# Altium PCB PCB11.PcbDoc (part 2 of 2)
Units mm, origin at the board's own origin, x right, y up, seen from the top; angles counter-clockwise.
Board outline 71.75 x 53.09 mm, 4 copper layers (Top Layer 1, Top Layer, Bottom Layer, Bottom Layer 1), stack 0.603 mm thick; 100 components, 62 nets, 352 pads, 213 vias.
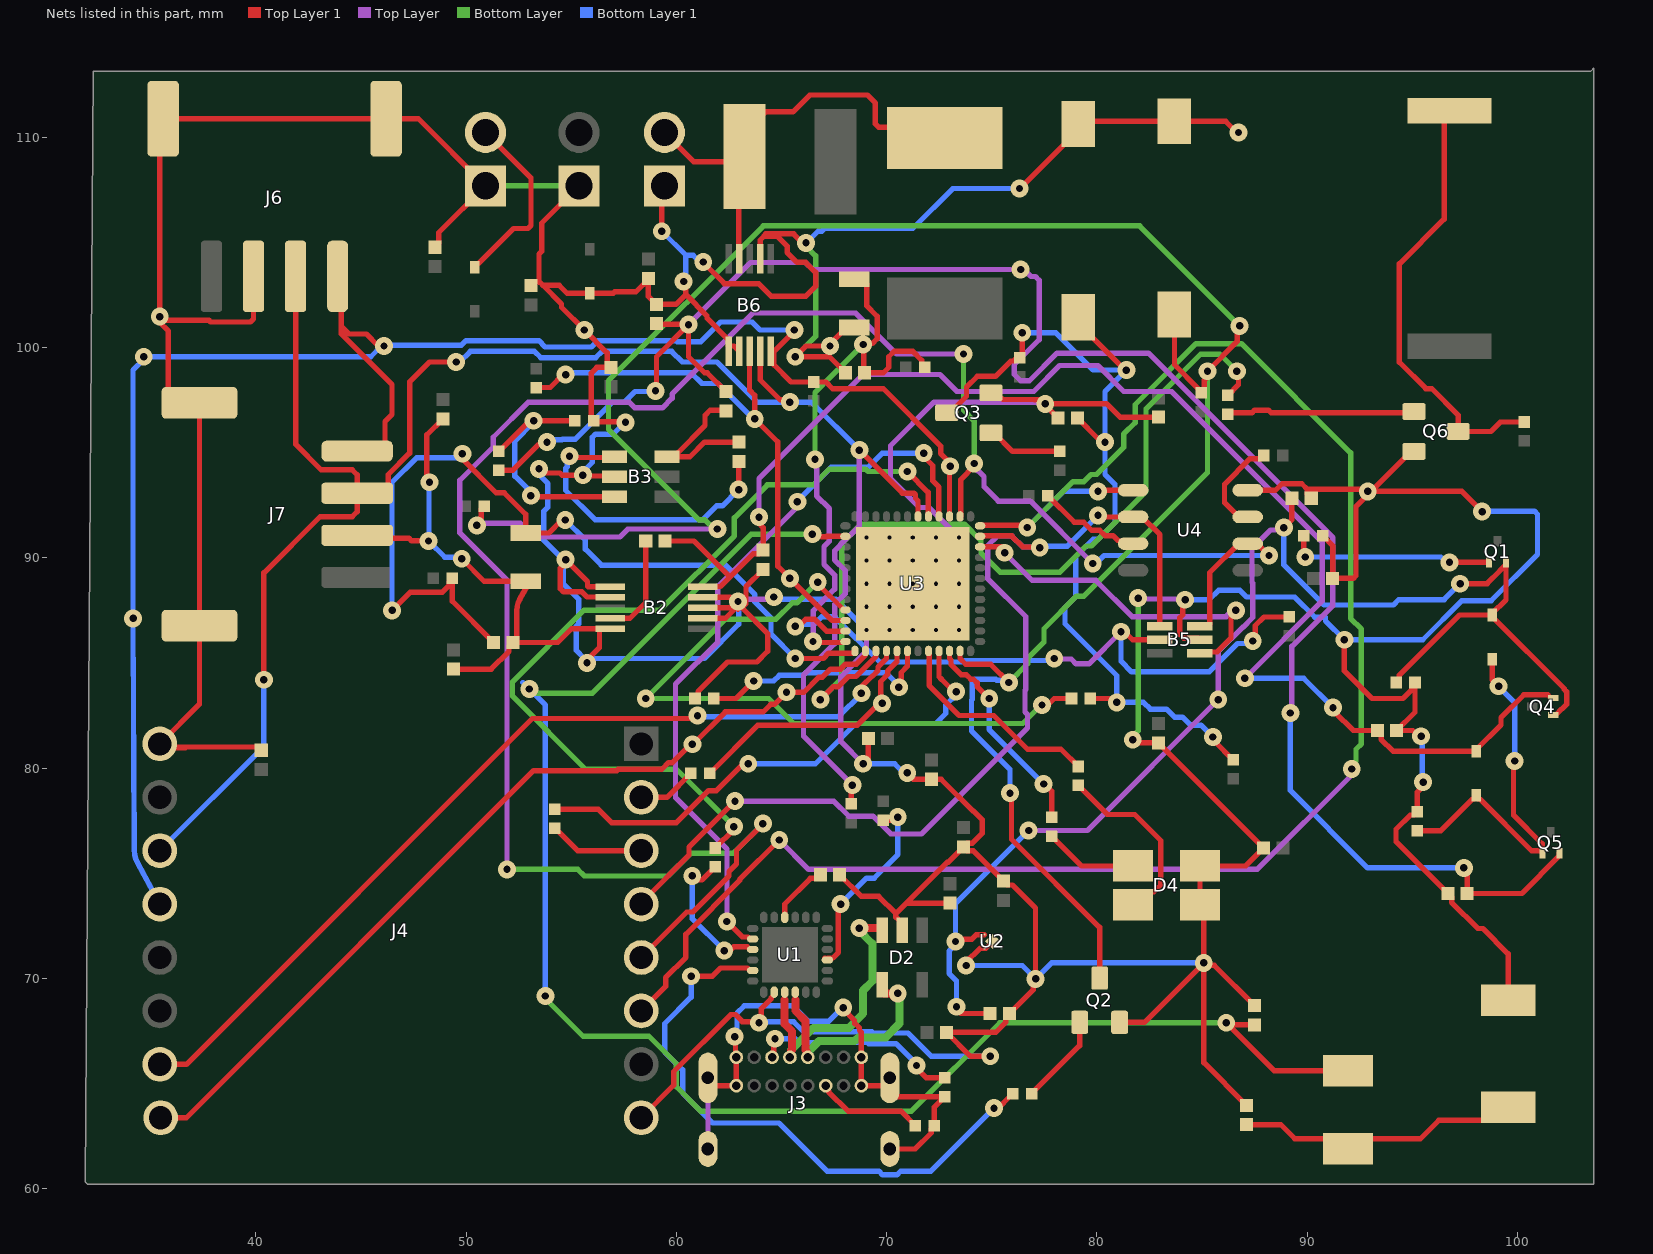
[diagram p4: the nets of this part, all layers, seen from the top]

## Via types
v1: diameter 0.85, hole 0.35, Top Layer 1 to Bottom Layer 1, 184 vias
v2: diameter 0.5, hole 0.2, Top Layer 1 to Bottom Layer 1, 29 vias

## Nets (pads, with @x,y where several pads share a name; then routed paths per layer and width w, separated by ;. In a path a pad name is that pad's centre, name@x,y a point inside that pad or via, vN(x,y) a via of type N, cw(c..) or ccw(c..) an arc to the next point about the centre after c; other vN are vias at no path point) (continued)
GND: B1.1 B2.2 B2.3 B2.4 B2.6 B2.7 B2.10 B3.2 B4.2 B5.2 B6.1 B6.2 B6.7 B7.1 C1.2 C2.2 C3.1 C4.2 C5.1 C6.2 C7.2 C8.2 C9.2 C10.2 C11.2 C13.2 C14.1 C15.2 C16.1 C17.1 C18.2 C19.2 C20.2 C21.1 C22.2 C23.2 C24.2 C25.2 C26.1 C27.1 C28.1 C29.1 C30.1 D2.2 D4.2 D4.4 DA2.1 J1.1 J2.1 J4.8 J4.16 J5.1 J6.3 J6.MP1 J6.MP2 J7.3 J7.MP1 J7.MP2 Q2.2 Q3.2 Q6.2 R5.2 R9.2 R10.2 R13.1 R19.2 SW1.2 SW2.2 U1.2 U2.2 U2.5 U3.49 U4.4 | length 457.6
  Top Layer 1 w0.254: 36.639,80.963 35.623,80.963 J4.16@35.584,81.002 ; J6.3@39.894,103.388 39.894,101.368 39.745,101.219 37.854,101.219 37.766,101.307 35.599,101.307 v1(35.433,101.473) ; C25.2@40.259,80.851 40.108,81.002 J4.16@35.584,81.002 ; J7.3@44.821,91.075 44.956,90.94 47.283,90.94 47.41,90.813 48.208,90.813 v1(48.216,90.805) ; v1(48.26,93.599) 48.133,93.726 48.133,95.854 C26.1@48.895,96.616 ; C28.1@48.514,104.775 48.697,104.958 48.697,105.466 J1.1@50.927,107.696 47.735,110.888 J6.MP1@46.194,110.888 J6.MP2@35.594,110.888 35.433,110.727 v1(35.433,101.473) ; C11.2@49.403,84.709 51.197,84.709 52.045,85.557 52.045,85.796 C1.2@52.228,85.979 ; v1(49.795,89.958) 50.867,88.886 B1.1@52.832,88.886 52.832,88.527 52.547,88.013 ccw(c53.467,87.503) 52.415,87.506 52.411,86.162 C1.2@52.228,85.979 ; v1(53.467,94.234) 53.661,94.04 54.469,94.04 54.572,93.936 v1(55.557,93.936) 55.598,93.894 57.022,93.894 B3.2@57.063,93.853 ; J2.1@55.372,107.696 53.594,105.918 53.594,104.58 53.467,104.453 53.467,103.115 53.507,103.115 53.656,102.966 ; v1(55.753,85.007) 55.753,85.138 56.347,85.732 56.347,86.63 55.014,86.63 54.363,85.979 C1.2@52.228,85.979 ; B2.6@56.347,88.63 55.797,88.63 55.774,88.653 55.774,88.879 v1(54.737,89.916) 54.737,89.755 54.483,89.501 54.483,88.533 54.632,88.384 55.507,88.384 55.753,88.138 B2.7@56.855,88.138 ; v1(57.582,96.444) 57.543,96.482 56.145,96.482 55.959,96.668 55.959,98.794 56.225,99.06 C14.1@56.896,99.06 56.713,99.243 56.713,99.751 v1(55.626,100.838) 54.544,101.92 54.544,102.078 53.656,102.966 ; J4.8@58.333,63.373 59.88,64.92 59.88,65.568 62.596,68.283 62.806,68.283 63.144,67.945 63.878,67.945 v1(63.932,67.891) 64.046,68.005 64.046,68.567 64.522,69.043 64.522,69.076 ; C19.2@58.674,103.299 C19.2@58.674,103.251 ; v1(59.309,105.537) 59.309,107.569 J5.1@59.436,107.696 ; v1(60.35,103.143) 60.452,103.041 60.452,102.523 ; R19.2@60.891,83.312 61.039,83.46 61.039,83.649 62.436,85.046 63.834,85.046 64.346,85.558 64.346,86.403 v1@63.119,87.63 ; B2.2@61.255,87.13 62.344,87.13 62.844,87.63 B2.3@61.255,87.63 ; B2.4@61.255,88.13 62.57,88.13 62.74,87.96 62.74,87.734 v1(62.933,87.928) ; v1(61.281,104.073) 61.281,104.045 62.284,103.041 63.919,103.041 64.52,102.44 66.154,102.44 66.626,102.912 66.626,103.58 66.152,104.054 65.748,104.054 65.274,104.528 65.274,104.829 64.8,105.303 64.184,105.303 63.992,105.111 B6.7@63.992,104.222 ; B6.1@62.492,99.822 B6.1@62.492,100.053 ; B6.2@62.928,99.885 62.738,100.076 62.515,100.076 B6.1@62.492,100.053 ; v1@62.933,87.565 62.998,87.63 v1@63.119,87.63 ; C15.2@64.135,89.456 63.313,88.634 63.313,87.824 v1@63.119,87.63 ; 64.17,105.318 64.262,105.41 65.582,105.41 66.007,104.985 v1(66.168,104.985) ; C7.2@67.77,74.93 68.801,73.899 69.626,73.899 70.445,73.08 ; C29.1@68.041,98.806 67.279,99.568 v1(65.659,99.568) 66.167,100.076 v1(67.31,100.076) 67.31,100.165 68.103,100.958 B7.1@68.453,100.958 ; v1@68.961,80.01 69.136,80.185 C20.2@69.136,81.407 ; D2.2@70.739,72.293 70.739,72.618 70.445,72.912 70.445,73.08 ; v1@71.12,79.629 71.278,79.471 C21.1@72.136,79.471 72.596,79.471 74.107,77.96 74.141,77.96 74.549,77.552 74.549,76.898 74.082,76.431 73.843,76.431 C27.1@73.66,76.248 ; C17.1@73.025,73.581 70.975,73.581 70.975,73.61 ; v1(73.787,70.612) 73.787,70.771 74.446,71.43 U2.2@74.652,71.43 74.72,71.43 75.045,71.755 U2.5@75.057,71.755 ; v1(74.93,66.294) 73.993,66.294 C4.2@72.85,67.437 75.2,67.437 75.667,67.904 75.667,68.143 C16.1@75.85,68.326 76.975,69.451 76.975,69.863 v1(77.089,69.977) 77.089,73.343 75.987,74.445 75.748,74.445 C3.1@75.565,74.628 74.128,76.065 73.843,76.065 C27.1@73.66,76.248 ; Q3.2@74.964,97.851 75.237,97.578 75.494,97.578 75.536,97.536 77.023,97.536 77.036,97.523 77.251,97.523 77.264,97.536 77.476,97.324 v1(77.548,97.324) ; v1(76.327,107.569) 76.34,107.569 79.121,110.35 SW1.2@79.121,110.64 79.248,110.767 SW2.2@83.693,110.767 86.132,110.767 86.663,110.236 v1(86.741,110.236) ; v1@77.512,97.288 C5.1@78.153,96.647 ; v1@77.512,97.409 77.583,97.338 80.462,97.338 81.105,96.695 C30.1@82.931,96.695 ; Q2.2@81.087,67.911 82.262,67.911 v1(85.09,70.739) ; v1@81.788,81.28 81.867,81.201 C24.2@82.931,81.201 C6.2@87.932,76.2 87.079,75.347 D4.2@84.912,75.347 D4.4@84.912,73.497 85.09,73.319 v1(85.09,70.739) ; v1(84.201,88.011) 84.087,87.897 84.087,87.285 83.947,87.145 83.947,87.122 83.947,86.367 84.139,86.175 84.828,86.175 B5.2@84.897,86.106 ; C23.2@87.122,63.96 85.09,65.992 v1(85.09,70.739) ; U4.4@87.18,93.218 88.503,93.218 88.813,93.528 89.749,93.528 90.018,93.259 ; C22.2@87.503,68.707 85.585,70.625 85.204,70.625 v1(85.09,70.739) ; C2.2@90.201,92.837 90.018,93.02 90.018,93.259 ; R5.2@90.747,91.059 91.217,90.589 C8.2@91.217,89.027 92.202,89.027 92.329,89.154 92.329,92.452 v1@92.964,93.087 ; v1(91.777,86.106) 91.777,84.626 93.091,83.312 94.561,83.312 94.986,83.737 94.986,83.926 R9.2@95.134,84.074 95.134,82.657 C9.2@94.265,81.788 95.03,81.788 v1@95.504,81.314 ; v1(92.888,93.164) 97.364,93.164 v1(98.326,92.201) ; v1@92.888,93.259 90.018,93.259 ; v1@93.136,93.259 94.939,95.062 Q6.2@95.089,95.062 ; v1@95.504,79.121 95.25,78.867 R10.2@95.25,77.92 95.102,77.772 94.913,77.772 94.234,77.093 94.234,76.502 C10.2@96.695,74.041 96.878,73.858 96.878,73.619 98.127,72.371 98.365,72.371 99.568,71.168 B4.2@99.568,68.971 ; v1(35.433,101.473) 35.433,101.198 35.843,100.788 35.843,97.993 36.461,97.375 J7.MP1@37.321,97.375 J7.MP2@37.321,86.775 37.321,83.041 J4.16@35.433,81.153 J4.16@35.584,81.002 ; 53.656,102.966 54.43,102.966 54.814,102.582 DA2.1@55.88,102.582 56.994,102.582 57.072,102.66 58.083,102.66 C19.2@58.674,103.251 ; C19.2@58.674,103.251 58.674,102.441 C13.2@59.055,102.06 59.989,102.06 60.452,102.523 ; 60.452,102.523 61.46,101.515 61.46,101.404 62.469,100.395 62.469,100.076 B6.1@62.492,100.053 ; 70.445,73.08 70.975,73.61 ; 70.975,73.61 72.882,75.517 72.929,75.517 C27.1@73.66,76.248
  Top Layer w0.254: v1(62.933,87.928) 63.038,88.033 64.538,88.033 v1(64.643,88.138) ; v1(68.885,80.21) 67.829,81.265 67.829,84.346 69.047,85.564 v2(69.047,86.573) ; v2(73.447,90.973) 72.023,92.397 71.564,92.397 70.187,93.773 70.187,95.333 72.263,97.409 77.463,97.409 v1(77.548,97.324) ; v1(81.966,88.084) 82.003,88.047 84.165,88.047 v1(84.201,88.011)
  Bottom Layer w0.254: J1.1@50.927,107.696 J2.1@55.372,107.696 ; v1(65.659,99.568) 66.626,100.535 66.626,104.366 66.168,104.824 v1(66.168,104.985) ; v1(81.712,81.353) 81.712,81.514 81.966,81.768 v1(81.966,88.084)
  Bottom Layer 1 w0.254: v1(48.216,90.805) v1@48.238,90.827 ; v1(48.26,93.599) 48.238,93.577 v1@48.238,90.827 ; v1(49.795,89.958) 49.721,90.032 48.989,90.032 48.238,90.783 v1@48.238,90.827 ; v1(53.467,94.234) 53.467,93.959 53.892,93.534 53.892,92.413 53.701,92.222 53.701,90.825 54.61,89.916 v1(54.737,89.916) 54.617,89.796 54.617,88.773 55.364,88.026 55.364,86.871 55.245,86.752 55.245,85.598 55.6,85.243 v1@55.6,85.048 ; v1(55.557,93.936) 55.557,94.097 56.007,94.547 56.007,95.736 56.156,95.885 57,95.885 57.559,96.444 v1(57.582,96.444) ; v1@55.559,85.007 55.914,85.007 56.124,85.217 61.341,85.217 62.972,86.848 62.972,87.889 v1(62.933,87.928) ; v1(59.309,105.537) 60.452,104.394 ; v1(60.35,103.143) 60.452,103.245 60.452,104.394 ; v1(61.281,104.073) 61.119,104.073 60.799,104.394 60.452,104.394 ; v1(63.932,67.891) 63.976,67.935 65.586,67.935 66.06,67.461 69.308,67.461 69.363,67.406 71.018,67.406 72.13,66.294 v1(74.93,66.294) ; v1(64.643,88.138) 64.741,88.04 67.58,88.04 v2(69.047,86.573) ; v1@66.273,104.881 66.273,105.06 66.753,105.54 66.932,105.54 67.056,105.664 71.247,105.664 73.152,107.569 v1(76.327,107.569) ; v1(68.885,80.21) 70.388,80.21 70.825,79.773 v1(70.986,79.773) ; v2(69.047,88.773) v2(70.147,88.773) ; v1(73.787,70.612) 76.454,70.612 v1(77.089,69.977) 77.851,70.739 v1(85.09,70.739) ; v1(84.201,88.011) 85.35,88.011 85.804,88.465 86.792,88.465 87.119,88.138 89.408,88.138 90.367,87.179 90.875,87.179 90.875,87.008 v1(91.777,86.106) ; v1@91.862,86.192 91.948,86.106 95.504,86.106 97.365,87.967 98.762,87.967 100.965,90.17 100.965,92.075 100.816,92.224 98.348,92.224 v1(98.326,92.201) ; v1(95.428,81.514) 95.475,81.466 95.475,79.383 v1(95.523,79.336)
  other v2: 70.147,86.573 71.247,86.573 72.347,86.573 73.447,86.573 69.047,87.673 70.147,87.673 71.247,87.673 72.347,87.673 73.447,87.673 71.247,88.773 72.347,88.773 73.447,88.773 69.047,89.873 70.147,89.873 71.247,89.873 72.347,89.873 73.447,89.873 69.047,90.973 70.147,90.973 71.247,90.973 72.347,90.973
IO0_BOOT: R6.1 U1.23 | length 28.2
  Top Layer 1 w0.254: v1(60.706,70.104) 61.722,70.104 62.112,70.494 63.379,70.494 U1.23@63.44,70.433 ; v1@75.184,63.696 R6.1@76.004,64.516
  Bottom Layer 1 w0.254: v1(60.706,70.104) 60.706,69.106 59.443,67.844 59.443,66.508 60.302,65.65 60.302,64.545 61.729,63.118 64.883,63.118 67.168,60.833 69.634,60.833 69.811,60.656 70.499,60.656 70.676,60.833 72.115,60.833 v1(75.108,63.827)
NetB1_2: B1.2 C1.1 R1.1 U3.13 | length 42.4
  Top Layer 1 w0.254: v1(46.482,87.503) 47.35,88.371 48.878,88.371 49.197,88.69 49.197,88.879 R1.1@49.345,89.027 49.345,87.942 C1.1@51.308,85.979 ; v1(49.827,94.953) 49.827,94.699 51.435,93.091 51.816,93.091 52.832,92.075 B1.2@52.832,91.186 53.938,91.186 54.553,91.801 v1(54.717,91.801) ; v1(65.659,85.217) 66.992,85.217 67.246,85.471 U3.13@68.458,85.471 ; U3.13@68.458,85.573 U3.13@68.497,85.573
  Bottom Layer 1 w0.254: v1(46.482,87.503) 46.482,93.599 47.641,94.758 49.633,94.758 v1(49.827,94.953) ; v1(54.717,91.801) 55.673,90.845 55.673,90.417 56.435,89.655 62.346,89.655 63.739,88.262 63.739,87.902 64.502,87.139 64.502,86.374 v1(65.659,85.217)
NetB2_5: B2.5 C9.1 C15.1 D3.2 L2.2 Q4.2 | length 70
  Top Layer 1 w0.254: L2.2@59.467,90.805 60.833,90.805 62.547,89.09 ; B2.5@60.747,88.64 62.097,88.64 62.547,89.09 ; v1(63.932,91.938) 64.046,91.824 64.046,91.529 64.135,91.44 C15.1@64.135,90.376 63.952,90.193 63.65,90.193 62.547,89.09 ; v1@91.313,82.677 92.202,81.788 C9.1@93.345,81.788 93.528,81.605 93.528,81.366 94.088,80.806 D3.2@98.044,80.806 ; D3.2@98.044,80.876 99.229,82.061 99.229,82.41 100.311,83.492 101.448,83.492 101.609,83.331 Q4.2@101.719,83.331
  Top Layer w0.254: v1(63.932,91.938) 63.932,93.774 68.881,98.723 72.538,98.723 73.344,97.917 77.002,97.917 78.234,99.149 80.051,99.149 81.283,97.917 83.563,97.917 90.722,90.758 90.722,87.949 v1(87.046,84.274)
  Bottom Layer 1 w0.254: v1(87.046,84.274) 89.84,84.274 v1(91.237,82.877)
NetB2_9: B2.9 L2.1 | length 4.9
  Top Layer 1 w0.254: B2.9@56.855,87.13 57.793,87.13 58.547,87.884 L2.1@58.547,90.805
NetB3_1: B3.1 C12.1 | length 14.6
  Top Layer 1 w0.254: v1(54.923,94.839) 54.99,94.773 57.032,94.773 B3.1@57.063,94.803 ; v1(62.962,93.248) 62.977,93.262 62.977,94.569 C12.1@62.992,94.584
  Bottom Layer 1 w0.254: v1(54.923,94.839) 54.809,94.725 54.809,94.327 54.737,94.256 54.737,93.218 56.134,91.821 61.264,91.821 61.92,92.477 62.192,92.477 v1(62.962,93.248)
NetB3_3: B3.3 R11.1 R13.2 | length 12.5
  Top Layer 1 w0.254: R11.1@51.562,95.065 53.017,96.52 v1(53.213,96.52) R13.2@55.176,96.52 ; v1(53.086,92.964) 53.147,92.903 B3.3@57.063,92.903
  Bottom Layer 1 w0.254: v1(53.086,92.964) 53.086,93.125 52.324,93.887 52.324,95.565 53.213,96.454 v1(53.213,96.52)
NetB3_6: B3.6 C12.2 L1.1 | length 7.3
  Top Layer 1 w0.254: B3.6@59.563,94.803 B3.6@59.878,94.803 ; L1.1@62.23,97.028 61.617,97.028 61.368,96.78 61.368,96.293 60.051,94.976 60.036,94.976 59.878,94.818 B3.6@59.878,94.803 ; C12.2@62.992,95.504 61.341,95.504 60.64,94.803 B3.6@59.878,94.803
NetB4_1: B4.1 C23.1 L3.2 | length 13.7
  Top Layer 1 w0.254: C23.1@87.122,63.04 88.757,63.04 89.424,62.373 91.479,62.373 L3.2@91.948,61.904 92.417,62.373 95.393,62.373 96.266,63.246 98.943,63.246 B4.1@99.568,63.871
NetB5_1: B5.1 U3.34 | length 16.7
  Top Layer 1 w0.254: U3.34@74.447,90.523 75.466,90.523 v1@75.565,90.424 ; B5.1@84.897,85.456 84.966,85.525 85.723,85.525 86.386,86.188 86.386,87.208 86.614,87.436 v1(86.614,87.503)
  Top Layer w0.254: v1(75.616,90.243) 76.93,88.929 79.951,88.929 81.675,87.205 86.155,87.205 86.453,87.503 v1(86.614,87.503)
NetB5_5: B5.5 R20.1 U3.11 | length 33.2
  Top Layer 1 w0.254: v1(65.659,86.741) 65.82,86.741 66.154,87.075 66.592,87.075 67.152,86.515 U3.11@68.047,86.515 ; v1(81.153,86.487) 81.314,86.487 81.695,86.106 B5.5@82.997,86.106 ; v1(87.421,86.044) 87.535,86.158 87.535,86.773 87.953,87.191 R20.1@89.154,87.191
  Top Layer w0.254: v1(77.978,85.217) 78.005,85.19 78.784,85.19 79.011,84.963 79.629,84.963 v1(81.153,86.487)
  Bottom Layer 1 w0.254: v1(65.659,86.741) 65.75,86.832 66.541,86.832 66.903,87.195 67.533,87.195 69.677,85.051 73.664,85.051 73.731,85.119 77.88,85.119 v1(77.978,85.217) ; v1(81.153,86.487) 81.153,85.09 81.661,84.582 85.344,84.582 86.692,85.93 87.307,85.93 v1(87.421,86.044)
NetB6_3: B6.3 R23.2 U3.10 | length 26.7
  Top Layer 1 w0.254: R23.2@53.34,98.102 54.004,98.102 54.62,98.718 v1(54.737,98.718) ; B6.3@63.484,99.822 63.484,97.976 63.732,97.728 v1(63.732,96.61) 64.826,95.516 64.826,89.606 v1(65.405,89.027) 67.409,87.023 U3.10@68.047,87.023
  Bottom Layer 1 w0.254: v1(54.737,98.718) 54.825,98.806 60.706,98.806 61.214,98.298 61.976,98.298 63.664,96.61 v1(63.732,96.61)
NetB6_9: B6.9 J5.2 P1.1 X1.2 | length 22.5
  Top Layer 1 w0.254: J5.2@59.436,110.236 60.833,108.839 P1.1@62.992,108.839 ; B6.9@62.969,104.222 62.969,108.816 P1.1@62.992,108.839 ; P1.1@63.246,109.093 P1.1@62.992,108.839 ; X1.2@72.771,109.968 72.249,110.49 69.618,110.49 69.469,110.639 69.469,111.633 69.088,112.014 66.352,112.014 65.55,111.212 64.246,111.212 63.373,110.339 63.373,108.839 P1.1@62.992,108.839
NetB7_2: B7.2 C29.2 R26.1 U3.12 | length 27
  Top Layer 1 w0.254: v1(66.501,86.026) 66.548,85.979 U3.12@68.047,85.979 ; B7.2@68.453,103.258 68.803,103.258 69.051,103.01 69.051,101.999 69.559,101.491 69.559,100.425 69.336,100.202 v1@68.961,100.202 ; v1(68.885,100.149) 68.923,100.111 68.923,98.844 C29.2@68.961,98.806 69.85,98.806 70.104,99.06 70.104,99.568 70.358,99.822 71.251,99.822 71.676,99.397 71.676,99.208 R26.1@71.824,99.06
  Top Layer w0.254: v1(66.501,86.026) 66.516,86.042 66.516,87.496 67.532,88.512 67.532,89.18 67.024,89.688 67.024,90.544 67.278,90.798 67.278,92.341 66.675,92.945 v1@66.675,94.488
  Bottom Layer w0.254: v1(66.599,94.688) 66.599,97.863 v1(68.885,100.149)
NetC2_1: C2.1 C16.2 D1.2 Q1.2 Q4.1 R9.1 U2.1 | length 65.4
  Top Layer 1 w0.254: v1(73.279,71.755) 73.393,71.869 74.062,71.869 74.273,72.08 U2.1@74.652,72.08 ; v1@73.406,68.453 73.533,68.326 C16.2@74.93,68.326 ; v1(88.9,91.44) 89.281,91.821 C2.1@89.281,92.837 ; R9.1@94.234,84.074 94.382,84.222 94.382,84.411 97.254,87.283 D1.2@98.806,87.283 ; v1(97.282,88.773) 98.565,88.773 99.181,89.389 99.181,89.408 99.447,89.674 99.447,89.784 Q1.2@99.46,89.797 99.46,88.007 D1.2@98.806,87.353 ; D1.2@98.806,87.213 102.235,83.784 102.235,83.744 102.35,83.629 102.35,83.033 102.127,82.81 102.108,82.81 101.829,82.531 Q4.1@101.719,82.531
  Top Layer w0.254: v1(76.759,77.035) 79.553,77.035 v1(85.776,83.258) 85.776,85.54 86.934,86.697 86.948,86.697 87.42,87.169 87.42,88.791 87.383,88.828 87.383,90.45 88.26,91.326 88.786,91.326 v1(88.9,91.44)
  Bottom Layer 1 w0.254: v1(73.33,68.653) 73.33,69.88 72.981,70.229 72.981,71.296 73.279,71.594 v1(73.279,71.755) 73.279,73.554 v1(76.759,77.035) ; v1(88.9,91.44) 88.9,89.662 90.805,87.757 94.107,87.757 94.361,88.011 96.52,88.011 v1(97.282,88.773)
NetC5_2: C5.2 Q3.3 R12.2 R18.1 R29.2 SW1.1 | length 43.4
  Top Layer 1 w0.254: Q3.3@72.864,96.901 73.014,96.901 73.801,97.688 73.801,98.118 74.315,98.632 75.184,98.632 75.914,99.362 76.047,99.362 76.454,99.77 v1(76.454,100.711) ; C5.2@79.073,96.647 80.102,95.618 80.277,95.618 v1(80.391,95.504) ; SW1.1@79.121,101.45 79.121,101.15 81.338,98.933 v1(81.407,98.933) ; R18.1@79.698,83.312 80.772,83.312 v1@80.899,83.185 ; v1@85.598,81.407 85.598,81.28 R12.2@86.487,80.391
  Bottom Layer 1 w0.254: v1(76.454,100.711) 78.041,100.711 79.819,98.933 v1(81.407,98.933) 80.391,97.917 v1(80.391,95.504) 80.391,93.974 80.867,93.498 80.867,91.687 80.082,90.901 79.834,90.901 79.001,90.069 79.001,88.142 78.486,87.627 78.486,86.868 80.95,84.404 v1(80.95,83.131) 82.223,83.131 82.55,82.804 83.312,82.804 83.693,82.423 84.074,82.423 84.455,82.042 84.96,82.042 v1(85.522,81.48)
NetC7_1: C7.1 U1.16 | length 2.9
  Top Layer 1 w0.254: U1.16@65.159,72.898 65.159,73.541 66.374,74.756 66.676,74.756 C7.1@66.85,74.93
NetC10_1: C10.1 C13.1 L1.2 Q5.2 R11.2 | length 90.5
  Top Layer 1 w0.254: R11.2@51.562,94.165 52.218,94.165 53.443,95.39 53.734,95.39 v1(53.848,95.504) ; v1(59.011,97.944) 59.055,97.988 59.055,99.568 v1(60.579,101.092) ; C13.1@59.055,101.14 59.079,101.116 60.555,101.116 v1(60.579,101.092) ; L1.2@62.357,97.917 61.468,98.806 61.341,98.806 60.579,99.568 v1(60.579,101.092) ; v1@97.536,75.057 97.615,74.978 C10.1@97.615,74.041 100.216,74.041 101.987,75.812 101.987,75.941 Q5.2@102,75.954
  Top Layer w0.254: v1(60.579,101.092) 63.539,104.052 66.154,104.052 66.491,103.715 76.207,103.715 v1@76.378,103.886 ; v1(76.378,103.715) v1@76.378,103.886 ; v1@89.281,82.423 89.281,85.79 91.23,87.739 91.23,90.968 82.459,99.739 78.105,99.739 76.791,98.425 76.371,98.425 76.073,98.723 76.073,99.19 77.26,100.377 77.26,103.204 77.08,103.384 76.871,103.384 76.378,103.876 v1@76.378,103.886
  Bottom Layer 1 w0.254: v1(53.848,95.504) 53.962,95.618 54.561,95.618 54.589,95.645 55.198,95.645 56.961,97.409 57.531,97.409 58.039,97.917 58.984,97.917 v1(59.011,97.944) ; v1(89.205,82.623) 89.205,78.937 92.885,75.257 v1(97.46,75.257)
  other v1: 89.205,82.623
NetD1_1: D1.1 D3.1 Q5.1 R10.1 | length 18
  Top Layer 1 w0.254: R10.1@95.25,77.02 96.358,77.02 97.871,78.533 97.941,78.533 D3.1@98.044,78.636 ; D3.1@98.044,78.706 D3.1@98.044,78.636 ; D1.1@98.806,85.183 98.806,84.201 v1@99.06,83.947 ; v1@99.822,80.264 99.822,77.763 101.187,76.398 101.187,75.967 Q5.1@101.2,75.954 101.2,76.058 101.187,76.071 100.679,76.071 98.217,78.533 98.147,78.533 D3.1@98.044,78.636
  Bottom Layer 1 w0.254: v1(99.111,83.893) 99.873,83.131 v1(99.873,80.337)
NetD4_1: D4.1 R16.1 | length 4.4
  Top Layer 1 w0.254: R16.1@77.851,76.766 79.27,75.347 D4.1@81.712,75.347
NetD4_3: D4.3 R24.1 | length 8.8
  Top Layer 1 w0.254: R24.1@79.121,79.179 80.505,77.795 81.807,77.795 83.043,76.559 83.043,74.439 82.724,74.12 82.335,74.12 D4.3@81.712,73.497
NetDA1_2: DA1.2 J1.2 | length 8.8
  Top Layer 1 w0.254: DA1.2@50.419,103.827 50.419,103.897 50.522,104 50.592,104 52.256,105.664 52.937,105.664 53.086,105.813 53.086,108.077 J1.2@50.927,110.236
NetJ3_A1: J3.A1 J3.A12 J3.B1 J3.B12 J3.S1 J3.S2 J3.S3 J3.S4 R3.2 R4.2 | length 27.4
  Top Layer 1 w0.254: J3.S3@61.505,65.267 61.505,65.195 61.803,64.897 J3.B12@62.855,64.897 J3.A1@62.855,66.247 62.815,66.287 62.815,67.189 v1(62.775,67.228) ; v1(67.944,68.61) 67.944,68.535 68.477,68.003 68.477,67.829 68.535,67.829 68.715,67.649 68.715,67.522 68.805,67.432 J3.A12@68.805,66.247 J3.B1@68.805,64.897 69.857,64.897 J3.S4@70.155,65.195 ; J3.S2@70.155,61.887 71.358,61.887 72.126,62.655 72.126,62.844 R4.2@72.274,62.992 72.274,63.881 R3.2@72.771,64.378 70.469,64.378 70.155,64.692 J3.S4@70.155,65.195 ; J3.S4@70.155,65.267 J3.S4@70.155,65.195
  Top Layer w0.254: J3.S1@61.505,61.887 J3.S3@61.505,65.267
  Bottom Layer 1 w0.254: v1(62.775,67.228) 62.889,67.342 62.889,68.35 63.236,68.697 65.542,68.697 66.27,67.969 67.266,67.969 67.907,68.61 v1(67.944,68.61)
NetJ3_A5: J3.A5 R3.1 | length 9.5
  Top Layer 1 w0.254: J3.A5@64.555,66.247 64.631,66.323 64.631,66.79 v1@64.77,66.929 ; v1@71.501,65.659 71.882,65.278 R3.1@72.771,65.278
  Bottom Layer 1 w0.254: v1(64.694,67.129) 65.673,67.129 65.849,66.953 69.097,66.953 69.153,66.898 70.449,66.898 71.425,65.922 v1(71.425,65.859)
NetJ3_B5: J3.B5 R4.1 | length 5.1
  Top Layer 1 w0.254: J3.B5@67.105,64.897 67.105,64.79 67.249,64.646 67.249,64.605 68.168,63.686 70.68,63.686 R4.1@71.374,62.992
NetJ4_2: J4.2 R14.2 | length 2.8
  Top Layer 1 w0.254: J4.2@58.333,78.613 59.552,78.613 R14.2@60.695,79.756
NetJ4_3: J4.3 R15.2 | length 4.5
  Top Layer 1 w0.254: R15.2@54.229,77.147 55.303,76.073 J4.3@58.333,76.073
NetJ4_9: J4.9 U3.14 | length 42.6
  Top Layer 1 w0.254: J4.9@35.473,63.373 36.703,63.373 53.213,79.883 57.179,79.883 57.243,79.947 59.316,79.947 59.633,80.264 59.817,80.264 v1@60.552,80.999 ; v1(60.767,81.136) 60.791,81.136 62.332,82.677 64.135,82.677 64.494,83.036 64.668,83.036 v1(65.241,83.609) 66.065,83.609 66.784,84.328 66.955,84.328 67.336,84.709 67.818,84.709 68.058,84.949 68.566,84.949 68.997,85.38 U3.14@68.997,85.573
NetJ4_10: J4.10 U3.16 | length 43.4
  Top Layer 1 w0.254: J4.10@35.433,65.913 36.703,65.913 53.149,82.359 61.024,82.359 v1@61.087,82.296 ; v1(68.801,83.562) 68.642,83.722 68.642,83.743 69.508,84.554 69.596,84.642 69.596,84.811 69.997,85.212 U3.16@69.997,85.573
  Bottom Layer 1 w0.254: v1(61.011,82.496) 61.055,82.452 67.717,82.452 68.801,83.536 v1(68.801,83.562)
NetLS1_N: LS1.N Q6.3 R27.2 | length 20.9
  Top Layer 1 w0.254: LS1.N@96.774,111.264 96.52,111.01 96.52,106.112 94.393,103.985 94.393,99.306 95.65,98.05 95.932,98.05 97.189,96.793 Q6.3@97.189,96.012 98.746,96.012 99.196,96.462 R27.2@100.33,96.462
NetQ1_1: Q1.1 R5.1 | length 9.4
  Top Layer 1 w0.254: R5.1@89.847,91.059 89.847,90.366 v1@89.916,90.297 ; v1@97.028,89.916 97.147,89.797 Q1.1@98.66,89.797
  Bottom Layer 1 w0.254: v1(89.916,90.043) 96.359,90.043 96.613,89.789 v1(96.774,89.789)
NetQ2_1: Q2.1 R6.2 | length 4.3
  Top Layer 1 w0.254: R6.2@76.904,64.516 79.187,66.799 Q2.1@79.187,67.911
NetQ2_3: Q2.3 R7.2 R30.2 SW2.1 U3.23 | length 105.8
  Top Layer 1 w0.254: v1(50.513,91.544) 50.513,91.706 50.721,91.914 50.721,92.308 R7.2@50.869,92.456 ; U3.23@73.497,85.573 73.497,85.212 73.767,84.942 74.951,84.942 v1(75.819,84.074) ; v1@75.946,78.613 75.946,76.619 80.137,72.428 Q2.3@80.137,70.011 ; SW2.1@83.693,101.577 83.693,99.187 84.815,98.065 84.815,98.007 R30.2@84.963,97.859 85.111,98.007 85.111,98.446 v1@85.344,98.679 ; v1(85.268,98.879) 86.678,100.289 86.678,100.924 v1(86.792,101.038)
  Top Layer w0.254: v1(50.513,91.544) 50.608,91.64 52.582,91.64 53.227,90.995 57.322,90.995 57.699,91.373 v1(61.955,91.373)
  Bottom Layer w0.254: v1(61.955,91.373) 61.794,91.373 61.356,91.811 61.074,91.811 56.776,96.11 56.776,98.428 64.138,105.791 82.039,105.791 v1(86.792,101.038) ; v1(75.819,84.074) 76.71,84.965 76.71,85.216 77.487,85.993 77.487,86.628 79.041,88.182 79.394,88.182 85.268,94.056 v1(85.268,98.879)
  Bottom Layer 1 w0.254: v1(75.819,84.074) 75.705,84.188 75.237,84.188 75.196,84.229 74.226,84.229 74.077,84.081 74.077,83.268 74.041,83.232 74.041,81.77 75.87,79.941 v1(75.87,78.813)
NetQ3_1: Q3.1 R8.2 | length 3.6
  Top Layer 1 w0.254: Q3.1@74.964,95.951 75.114,95.951 76,95.065 R8.2@78.232,95.065
NetQ6_1: Q6.1 R25.1 | length 9
  Top Layer 1 w0.254: R25.1@86.233,96.832 86.298,96.897 87.375,96.897 87.503,97.025 88.171,97.025 88.299,96.897 95.024,96.897 Q6.1@95.089,96.962
NetR2_1: R2.1 U1.9 | length 9.4
  Top Layer 1 w0.254: U1.9@67.06,70.971 67.066,70.965 67.066,70.917 67.11,70.873 U1.9@67.184,70.873 ; U1.9@67.21,70.971 67.451,70.971 67.709,71.229 67.709,73.424 v1(67.818,73.533) ; R2.1@69.85,77.528 70.554,77.528 v1@70.612,77.47
  Bottom Layer 1 w0.254: v1(67.818,73.533) 69.054,74.769 69.414,74.769 70.536,75.892 v1(70.536,77.67)
NetR14_1: R14.1 U3.17 | length 12.3
  Top Layer 1 w0.254: R14.1@61.595,79.756 63.881,82.042 68.612,82.042 69.648,83.078 v1(69.793,83.078) ; v1@69.723,83.185 69.723,84.124 70.052,84.453 70.052,84.622 70.497,85.067 U3.17@70.497,85.573
NetR15_1: R15.1 U3.21 | length 24.4
  Top Layer 1 w0.254: R15.1@54.229,78.047 56.285,78.047 56.925,77.407 60.008,77.407 61.532,78.931 61.913,78.931 v1@63.246,80.264 ; U3.21@72.497,85.573 72.497,84.348 72.596,84.249 72.745,84.1 73.271,83.602 v1(73.309,83.64)
  Bottom Layer 1 w0.254: v1(63.424,80.21) 66.621,80.21 68.536,82.125 72.343,82.125 72.815,82.597 72.815,82.994 73.309,83.488 v1(73.309,83.64)
NetR16_2: R16.2 U3.22 | length 9.8
  Top Layer 1 w0.254: U3.22@72.997,85.573 72.997,85.212 73.068,85.141 73.068,84.922 73.556,84.434 73.805,84.434 74.01,84.229 74.133,84.229 74.307,84.055 74.307,83.888 v1(74.883,83.312) ; v1@77.724,79.023 77.851,78.896 R16.2@77.851,77.666
  Bottom Layer 1 w0.254: v1(74.883,83.312) 74.883,81.835 v1(77.47,79.248)
NetR17_1: R17.1 U3.41 | length 41.2
  Top Layer 1 w0.254: R17.1@61.849,76.2 62.738,77.089 v1(62.738,77.216) ; v1(70.993,94.107) 71.981,93.119 U3.41@71.981,91.973
  Bottom Layer w0.254: v1(62.738,77.216) 60.007,79.947 55.689,79.947 52.204,83.432 52.204,84.1 55.617,87.512 59.235,87.512 62.761,91.039 62.761,91.907 64.331,93.476 66.528,93.476 67.275,94.224 68.998,94.224 69.115,94.107 v1(70.993,94.107)
NetR17_2: R17.2 U1.21 | length 6.8
  Top Layer 1 w0.254: v1@60.833,74.676 61.225,74.676 R17.2@61.849,75.3 ; v1@62.357,71.12 62.734,71.497 63.377,71.497 U1.21@63.5,71.374
  Bottom Layer 1 w0.254: v1(60.757,74.876) 60.757,72.844 v1(62.281,71.32)
NetR18_2: R18.2 U3.9 | length 33.5
  Top Layer 1 w0.254: v1@66.726,88.771 U3.9@68.011,87.487 ; v1@77.47,82.804 77.978,83.312 R18.2@78.798,83.312
  Bottom Layer w0.254: v1(66.726,88.846) 65.743,87.863 65.517,87.863 64.728,87.073 62.308,87.073 v1(58.547,83.312) 64.399,83.312 65.586,82.125 76.48,82.125 77.358,83.004 v1(77.394,83.004)
NetR19_1: R19.1 U3.18 | length 11.5
  Top Layer 1 w0.254: R19.1@61.791,83.312 62.844,83.312 v1(63.678,84.147) ; v1(70.585,83.847) 70.699,83.961 70.699,84.551 70.997,84.848 U3.18@70.997,85.573
  Bottom Layer 1 w0.254: v1(63.678,84.147) 64.633,84.147 64.902,84.415 65.321,84.415 65.325,84.411 66.032,84.411 66.164,84.543 69.962,84.543 70.585,83.92 v1(70.585,83.847)
NetR24_2: R24.2 U3.20 | length 10.3
  Top Layer 1 w0.254: U3.20@71.997,85.573 71.997,85.43 72.027,85.4 72.027,83.929 73.45,82.506 75.101,82.506 76.708,80.899 78.301,80.899 R24.2@79.121,80.079
NetR25_2: R25.2 U3.15 | length 40.2
  Top Layer 1 w0.254: v1(66.853,83.258) 67.461,83.866 67.693,83.866 68.187,84.36 68.54,84.36 69.497,85.317 U3.15@69.497,85.573 ; R25.2@86.233,97.732 86.741,98.24 v1@86.741,98.679
  Bottom Layer w0.254: v1(66.853,83.258) 67.876,84.281 67.876,90.695 68.786,91.604 73.708,91.604 74.495,90.817 74.495,90.224 75.399,89.32 78.253,89.32 79.494,90.562 79.742,90.562 82.338,93.158 82.338,97.089 84.934,99.685 85.859,99.685 v1(86.665,98.879)
NetR31_2: R31.2 U4.3 | length 4.7
  Top Layer 1 w0.254: U4.3@87.18,91.948 86.755,91.948 86.074,92.629 86.074,93.5 87.295,94.721 87.794,94.721 R31.2@87.942,94.869
NetR32_2: R32.2 U4.7 | length 5
  Top Layer 1 w0.254: R32.2@77.666,92.964 78.936,91.694 79.375,91.694 79.756,91.313 80.137,91.313 80.391,91.059 80.772,91.059 81.001,90.83 81.06,90.83 81.211,90.678 U4.7@81.73,90.678
NetU1_20: U1.20 U3.40 | length 35
  Top Layer 1 w0.254: v1(62.408,72.705) 63.143,71.971 63.41,71.971 63.508,71.873 U1.20@63.634,71.873 ; v1@71.768,94.821 72.205,94.384 72.205,93.657 72.489,93.373 U3.40@72.489,91.973
  Top Layer w0.254: v1(62.408,72.705) 62.408,76.149 59.961,78.596 59.961,83.994 61.976,86.009 61.976,88.646 v1@65.786,92.456
  Bottom Layer 1 w0.254: v1(62.408,72.705) v1@62.462,72.76 ; v1(65.762,92.67) 65.762,92.704 67.375,94.317 69.136,94.317 69.801,94.982 v1(71.768,94.982)
RF_IN: C22.1 L3.1 U3.2 | length 78.1
  Top Layer 1 w0.254: v1(66.472,91.132) 66.586,91.018 66.904,91.018 66.919,91.003 67.129,91.003 67.158,91.031 U3.2@68.047,91.031 ; v1@86.295,67.753 88.444,65.604 L3.1@91.948,65.604 ; v1@86.329,67.787 C22.1@87.503,67.787
  Bottom Layer w0.254: v1@53.086,83.566 56.007,83.566 63.573,91.132 v1(66.472,91.132) ; v1@53.848,68.961 55.562,67.247 58.705,67.247 59.997,65.955 59.997,64.85 61.161,63.686 71.182,63.686 75.387,67.891 v1(86.157,67.891)
  Bottom Layer 1 w0.254: 52.705,84.074 53.772,83.007 v1(53.772,69.161)
  other v1: 53.01,83.766
SCL_NET: B6.5 J4.13 J6.1 J7.1 R21.2 U3.39 | length 85.4
  Top Layer 1 w0.254: J6.1@44.069,101.854 44.069,101.009 ; J7.1@44.821,95.075 J7.1@45.78,95.075 ; J7.1@46.021,95.075 J7.1@45.78,95.075 ; v1(46.101,100.076) 45.826,100.076 45.257,100.645 44.433,100.645 44.069,101.009 ; v1(65.615,100.838) 65.615,100.794 64.643,99.822 64.643,99.187 65.463,98.367 R21.2@66.548,98.367 67.114,98.367 67.437,98.044 69.846,98.044 72.574,95.316 72.574,94.973 73.025,94.522 v1(73.025,94.361) 72.997,94.333 U3.39@72.997,91.973 ; 44.069,101.009 44.069,100.654 46.482,98.241 46.482,96.823 46.144,96.485 46.144,95.439 J7.1@45.78,95.075
  Bottom Layer 1 w0.254: 34.227,76.066 v1(34.163,87.122) 34.163,98.936 34.671,99.444 v1(34.671,99.568) 45.469,99.568 45.977,100.076 v1(46.101,100.076) 46.145,100.12 49.784,100.12 49.994,100.33 53.467,100.33 53.765,100.032 55.96,100.032 56.258,100.33 59.991,100.33 60.035,100.286 61.17,100.286 62.103,101.219 63.61,101.219 63.991,100.838 v1(65.615,100.838) ; 34.227,76.066 ccw(c35.433,76.073) 34.227,76.051 ccw(c35.433,76.073) 34.372,75.5 J4.13@35.433,73.533
SDA_NET: B6.4 J4.14 J6.2 J7.2 R22.2 U3.42 | length 92.4
  Top Layer 1 w0.254: v1(40.386,84.201) 40.386,89.291 43.051,91.956 44.583,91.956 44.821,92.194 J7.2@44.821,93.075 ; J6.2@41.894,103.388 41.894,95.41 43.11,94.194 44.583,94.194 44.821,93.956 J7.2@44.821,93.075 ; v1(49.53,99.314) 48.26,99.314 47.32,98.374 47.32,94.982 46.294,93.956 46.294,93.446 45.923,93.075 J7.2@44.821,93.075 ; B6.4@63.992,99.822 63.992,98.462 64.931,97.523 65.291,97.523 v1(65.405,97.409) ; R22.2@68.326,78.301 v1@68.326,79.121 ; v1(68.707,95.123) 70.75,93.08 71.302,93.08 71.374,93.008 71.374,92.837 71.497,92.714 U3.42@71.497,91.973
  Top Layer w0.254: v1(68.377,79.194) 66.047,81.524 66.047,84.433 67.532,85.918 67.532,87.793 68.04,88.301 68.04,89.39 67.532,89.898 67.532,90.333 67.786,90.587 67.786,90.605 68.707,91.525 v1(68.707,95.123)
  Bottom Layer 1 w0.254: J4.14@35.433,76.073 40.386,81.026 v1(40.386,84.201) ; v1(49.53,99.314) 49.697,99.314 50.205,99.822 53.257,99.822 53.555,99.524 56.17,99.524 56.468,99.822 59.781,99.822 60.289,99.314 61.932,99.314 63.837,97.409 v1(65.405,97.409) 66.421,97.409 v1(68.707,95.123)
SPI_CLK: B5.4 J4.4 U3.35 U4.6 | length 49.7
  Top Layer 1 w0.254: J4.4@58.333,73.533 58.333,73.591 60.603,75.862 60.603,76.246 62.595,78.237 62.86,78.237 v1@62.865,78.232 ; U3.35@74.447,91.049 75.95,91.049 76.483,90.516 77.261,90.516 v1(77.289,90.488) ; v1@80.264,91.948 U4.6@81.73,91.948 82.155,91.948 82.997,91.106 B5.4@82.997,86.756
  Top Layer w0.254: v1(62.789,78.432) 67.485,78.432 68.203,77.714 69.352,77.714 70.202,76.864 71.657,76.864 76.708,81.915 76.708,82.55 76.588,82.67 76.588,83.703 76.625,83.74 76.625,87.199 74.81,89.014 74.81,90.577 75.282,91.049 75.95,91.049 76.483,90.516 77.261,90.516 v1(77.289,90.488)
  Bottom Layer 1 w0.254: v1(77.289,90.488) 77.352,90.551 78.592,90.551 v1(80.061,92.021)
SPI_MISO: B5.3 J4.5 U3.38 U4.2 | length 101.6
  Top Layer 1 w0.254: J4.5@58.333,70.993 60.498,73.158 60.796,73.158 62.505,74.867 62.505,75.078 62.865,75.438 62.865,76.094 64.116,77.346 v1(64.116,77.362) ; U3.38@73.533,91.973 73.533,93.729 74.168,94.364 v1(74.168,94.488) ; B5.3@84.897,86.756 85.297,86.756 85.37,86.829 85.37,89.293 86.755,90.678 U4.2@87.18,90.678 87.63,90.678 v1@88.138,90.17
  Top Layer w0.254: v1(51.949,75.183) 51.949,88.944 49.707,91.186 49.707,93.692 51.293,95.278 51.293,95.74 52.962,97.409 57.756,97.409 58.028,97.138 59.344,97.138 59.803,97.596 59.803,97.796 59.817,97.81 59.817,97.816 63.644,101.644 68.53,101.644 70.479,99.695 v1(73.66,99.695) ; v1(74.168,94.488) 74.168,94.327 74.632,93.863 74.632,93.386 75.318,92.7 76.842,92.7 v1(79.807,89.735)
  Bottom Layer w0.254: v1(51.949,75.183) 55.314,75.183 55.63,74.867 59.609,74.867 60.691,75.95 62.704,75.95 v1(64.116,77.362) ; v1(73.66,99.695) 73.66,97.026 74.168,96.518 v1(74.168,94.488)
  Bottom Layer 1 w0.254: v1(79.807,89.735) 79.969,89.735 80.35,90.116 v1(88.189,90.116)
SPI_MOSI: J4.6 U3.36 U4.5 | length 86.2
  Top Layer 1 w0.254: J4.6@58.333,68.453 59.493,69.613 59.493,70.034 60.452,70.993 60.452,72.096 63.013,74.657 63.013,74.697 v1(64.897,76.581) ; U3.36@74.447,91.557 76.582,91.557 v1(76.691,91.448) ; v1@80.137,92.964 80.391,93.218 U4.5@81.73,93.218
  Top Layer w0.254: v1(64.897,76.581) 66.294,75.184 87.63,75.184 v1@92.202,79.756
  Bottom Layer w0.254: v1(76.691,91.448) 78.871,93.628 79.385,93.628 79.727,93.97 79.997,93.97 81.28,95.253 81.28,95.885 81.83,96.435 81.83,97.299 84.724,100.193 86.878,100.193 92.075,94.996 92.075,87.122 92.583,86.614 92.583,81.153 92.329,80.899 92.329,80.32 92.126,80.117 v1(92.126,79.956)
  Bottom Layer 1 w0.254: v1(76.691,91.448) 78.407,93.164 v1(80.061,93.164)
USB_N: D2.4 J3.A7 U1.4 | length 10.9
  Top Layer 1 w0.381: 65.659,68.961 65.659,68.462 66.148,67.974 66.148,66.593 66.204,66.537 66.204,66.298 J3.A7@66.255,66.247 ; D2.4@69.789,69.693 69.789,69.368 69.873,69.284 70.198,69.284 70.394,69.088 v1@70.612,69.088
  Bottom Layer w0.381: J3.A7@66.255,66.247 66.306,66.298 66.306,66.537 66.786,67.017 68.478,67.017 68.656,67.194 69.965,67.194 70.622,67.852 70.622,69.202 v1(70.536,69.288)
USB_P: D2.3 J3.A6 U1.3 | length 13
  Top Layer 1 w0.381: 65.151,68.961 65.151,67.841 65.513,67.479 65.513,66.593 65.456,66.537 65.456,66.298 J3.A6@65.405,66.247 ; v1(68.707,72.39) 69.705,72.39 69.789,72.306 D2.3@69.789,72.293
  Bottom Layer w0.381: J3.A6@65.405,66.247 65.456,66.298 65.456,66.585 66.523,67.652 68.215,67.652 68.883,68.319 68.883,69.426 69.323,69.866 69.323,71.648 68.707,72.263 v1(68.707,72.39)
pads on no net: D2.1 J3.A8 J3.B6 J3.B7 J3.B8 J4.1 J4.11 J4.12 U1.1 U1.10 U1.11 U1.12 U1.13 U1.14 U1.15 U1.17 U1.18 U1.22 U1.24 U1.25 U3.5 U3.6 U3.7 U3.8 U3.24 U3.27 U3.28 U3.29 U3.30 U3.31 U3.32 U3.33 U3.44 U3.45 U3.47 U3.48
copper on no net:
  other v2: 64.859,70.573 65.959,70.573 64.859,71.673 65.959,71.673

## Polygon pours and split planes (outlines as drawn)
GND on Top Layer 1 "GND_L01_P000" (solid, pour order 0): 33.048,112.807 103.767,112.807 103.767,60.102 32.792,60.102
+3V3_PRIO on Bottom Layer "+3V3_PRIO_L03_P001" (solid, pour order 1): 32.512,60.198 103.759,60.198 103.886,60.325 103.505,60.706 103.505,113.03 32.766,113.03 32.639,113.157
GND on Top Layer "GND_L02_P003" (solid, pour order 3): 32.258,112.903 32.258,59.817 32.512,59.563 33.02,60.071 104.14,60.071 104.14,113.03 103.886,113.284
SCL_NET on Bottom Layer 1 "SCL_NET_L04_P004" (solid, pour order 4): 31.623,113.284 31.623,59.817 31.75,59.69 104.521,59.69 104.521,113.538 104.267,113.792

## Keep-outs
Top Layer 1:
  rectangle: 96.647,60.96 102.743,71.374

## Silkscreen, mask and mechanical layers (free items; w line width, h text height)
Top Overlay:
  text "CARTE DE MONOTORING AVG BY RICARDO ET EDWIN" at 39.624,62.738 h0.3
Mechanical 1:
  the board outline again, w0.2

## Text inside footprints (layer, text, board x,y; h text height)
J3: Mechanical 13 "PCB EDGE" at 71.145,60.317 h0.81
LS1: Top Overlay "+" at 96.074,98.064 h1.27 r90; Mechanical 13 "+" at 96.074,98.064 h1.27 r90; Mechanical 13 "-" at 96.074,113.264 h1.27 r90
Q1: Mechanical 9 "SOT-723" at 97.394,90.047 h0.5
Q2: Mechanical 9 "SOT-23" at 78.721,68.711 h0.5
Q3: Mechanical 9 "SOT-23" at 74.164,95.485 h0.5 r90
Q4: Mechanical 9 "SOT-723" at 101.469,81.265 h0.5 r90
Q5: Mechanical 9 "SOT-723" at 99.934,76.204 h0.5
Q6: Mechanical 9 "SOT-23" at 95.889,97.428 h0.5 r270